# Altium PCB PCB1.PcbDocEVAL2.PcbDoc
Units mm, origin at the board's own origin, x right, y up, seen from the top; angles counter-clockwise.
Board outline 152.4 x 101.6 mm, 2 copper layers (Top Layer, Bottom Layer); 9 components, 5 nets, 39 pads, 0 vias.
Unrouted connection lines stored in the file: 13.
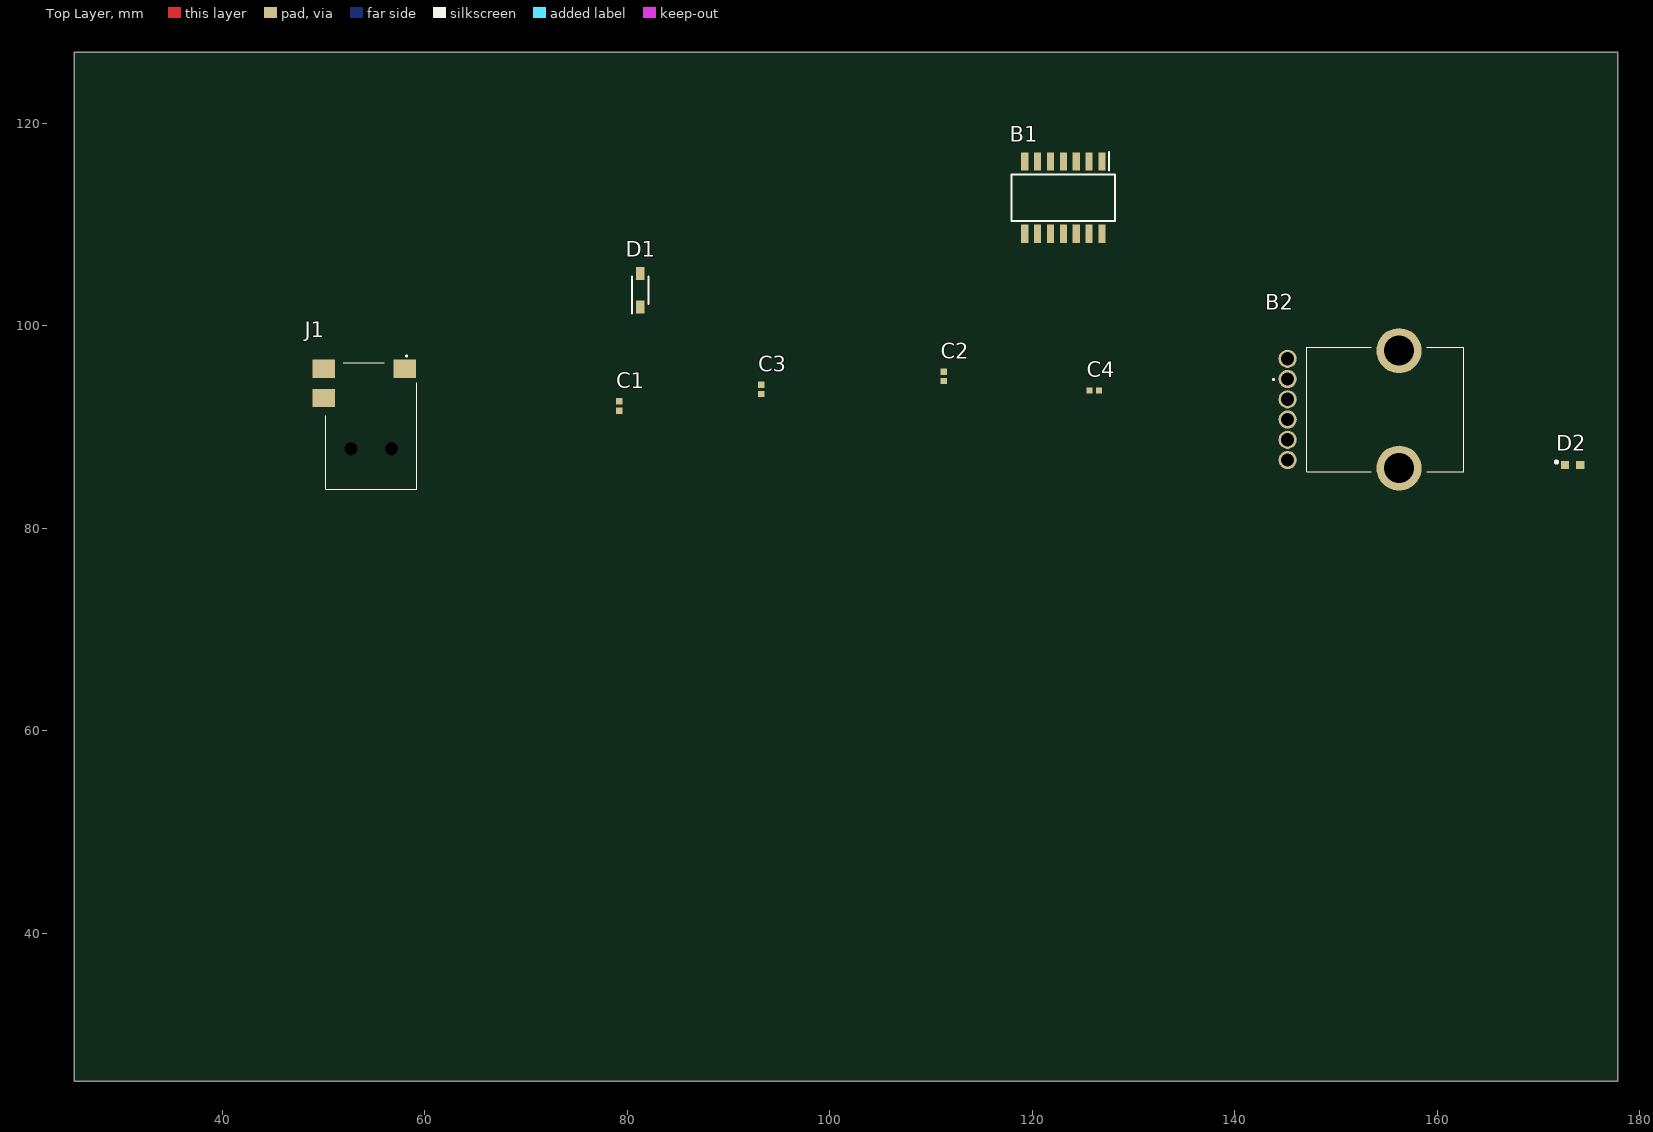
[diagram p0: Top Layer view]
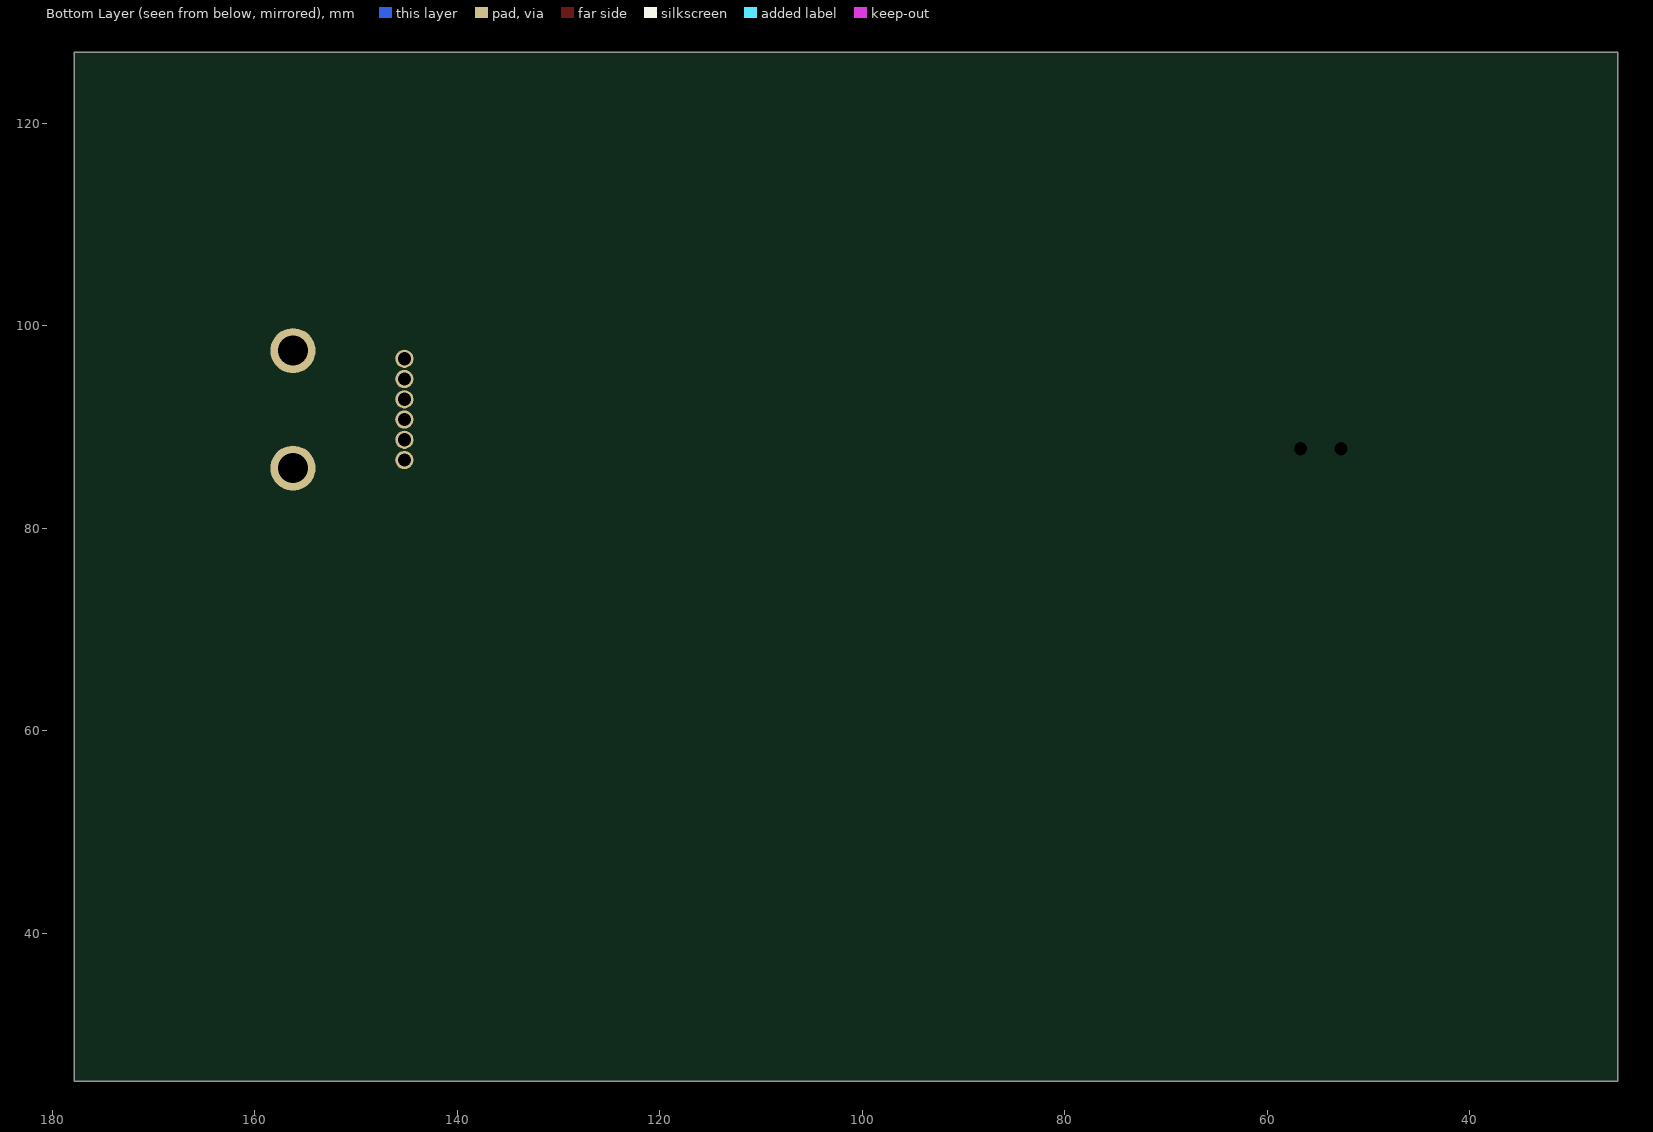
[diagram p1: Bottom Layer view, seen from below]

## Layer stack, top to bottom
Top Solder: solder mask 0.0102, Solder Resist, Dk 3.5
Top Layer: signal copper 0.0356
Dielectric 1: dielectric 0.32, FR-4, Dk 4.8
Bottom Layer: signal copper 0.0356
Bottom Solder: solder mask 0.0102, Solder Resist, Dk 3.5

## Board outline
25.4,25.4 177.8,25.4 177.8,127 25.4,127

## Design rules (kind name [scope] priority, off if disabled: settings)
Clearance [All] p1: gap=0.254 ignorepadtopadclearanceinfootprint=FALSE except(0: Arc-Hole Track-Hole SMDPad-Hole THPad-Hole Via-Hole Fill-Hole Poly-Hole Region-Hole Text-Hole)
PolygonConnect [All] p1: connectstyle=Relief reliefconductorwidth=0.254 reliefentries=4 polygonreliefangle="90 Angle" airgapwidth=0.254
RoutingVias [All] p1: holewidth=0.711 width=1.27 viastyle="Through Hole" minholewidth=0.711 minwidth=1.27 maxholewidth=0.711 maxwidth=1.27
SolderMaskExpansion [All] p1: expansion=0.102 istentingtop=FALSE
SupplyNets "Schematic Supply Nets" [InNet('GND')] p1: voltage=0.000
Width [All] p1: maxlimit=0.254 minlimit=0.254 preferedwidth=0.254
30 further rules are at their usual default settings.

## Components (designator, comment, footprint, x,y, rotation, side; value= is the part's Value field where it differs from the comment)
B1 "LM324NSR" SOIC127P780X200-14N 123.063,112.655 r270 top
B2 "PTV112-4420A-B104" PTV1124420AB104 145.21,94.736 r270 top
C1 "22uF" CAPC1005X06N 79.2,92.075 r90 top
C2 "22uF" CAPC1005X06N 111.252,94.996 r270 top
C3 "1uF" CAPC1005X06N 93.218,93.726 r270 top
C4 "1uF" CAPC1005X06N 126.111,93.599 r0 top
D1 "BZT52-C5V1-QX" SOD3616X130N 81.28,103.505 r90 top
D2 "LED-GREEN" SMD-1608-LED 173.355,86.233 r0 top
J1 "ADC-028-1-T/R" PJ1021SMTTR 54.738,90.108 r90 top

## Footprints (in the part's own frame and the unit in brackets; to place one, negate y for a bottom-side part, rotate by r counter-clockwise, add the part's x,y. Pads: shape width x height; smd on the part's side, far side on the other; paste and mask are expansions set on the pad)
CAPC1005X06N [mm] "Chip Capacitor, 2-Leads, Body 1,00x0,50mm, IPC Medium Density"
  rect 0.62x0.62 smd: 1(-0.46,0) 2(0.46,0)
  body extent -0.53,-0.28 0.53,0.28, height 0.55
PJ1021SMTTR [mm]
  rect 1.8x2.2 smd: 1(5.65,-3.3) 2(2.75,4.7) 3(5.65,4.7)
  round 0.65 hole 1.3 unplated: MH1(-2.25,-2) MH2(-2.25,2)
  silkscreen extent -6.25,-4.5 6.95,4.5, body extent -6.12,-3.94 6.38,5.46, height 6.01
PTV1124420AB104 [mm]
  round 1.8 hole 1.3: A1(0,0) A2(-2,0) A3(8,0) B1(2,0) B2(4,0) B3(6,0)
  round 4.455 hole 2.97: MH1(-2.8,11) MH2(8.8,11)
  silkscreen extent -3.15,-1.45 9.15,17.4, body extent -4.17,-0.55 10.19,17.4, height 20.6
SMD-1608-LED [mm]
  rect 0.8x0.8 smd paste+0 mask+0: 1(-0.75,0) 2(0.75,0)
  silkscreen extent -1.72,0.18 -1.47,0.42, body extent -1.25,-0.55 1.25,0.55, height 0.25
SOD3616X130N [mm]
  rect 1.25x0.8 smd: 1(-1.65,0) 2(1.65,0)
  silkscreen extent -2.27,-0.8 1.34,0.8, body extent -1.67,-0.84 1.93,0.76, height 1.19
SOIC127P780X200-14N [mm]
  rect 1.825x0.7 smd: 1(-3.562,3.81) 2(-3.562,2.54) 3(-3.562,1.27) 4(-3.562,0) 5(-3.562,-1.27) 6(-3.562,-2.54) 7(-3.562,-3.81) 8(3.562,-3.81) 9(3.562,-2.54) 10(3.562,-1.27) 11(3.562,0) 12(3.562,1.27) 13(3.562,2.54) 14(3.562,3.81)
  silkscreen extent -4.47,-5.1 2.3,5.1, body extent -3.9,-5.1 3.9,5.1, height 2

## Part data
B1: "Quadruple Operational Amplifier", Manufacturer_Name="Texas Instruments", Mouser Part Number=595-LM324NSR, Arrow Part Number=LM324NSR, Arrow Price/Stock=https://www.arrow.com/en/products/lm324nsr/texas-instruments?utm_currency=USD&region=nac, Datasheet Link=http://www.ti.com/lit/gpn/LM324, Geometry.Height=2mm, Manufacturer_Part_Number=LM324NSR, Mouser Price/Stock=https://www.mouser.co.uk/ProductDetail/Texas-Instruments/LM324NSR?qs=VBduBm9rCJQcjq4eh95DkA%3D%3D
B2: "Potentiometers PANEL CONTROL 100kOhm", Manufacturer_Name=Bourns, Mouser Part Number=652-PTV1124420AB104, Datasheet Link=https://www.bourns.com/docs/Product-Datasheets/PTVPTT.pdf, Geometry.Height=20.5mm, Manufacturer_Part_Number=PTV112-4420A-B104, Mouser Price/Stock=https://www.mouser.co.uk/ProductDetail/Bourns/PTV112-4420A-B104?qs=nqw9FAyaR8PT4wHHFlLdhA%3D%3D
C1 C2: library part Capacitor_pol
C3 C4: library part Capacitor
D1: "BZT52-Q series - Voltage regulator diodes@en-us", Manufacturer_Name=Nexperia, Mouser Part Number=771-BZT52-C5V1-QX, Datasheet Link=https://assets.nexperia.com/documents/data-sheet/BZT52-Q_SER.pdf, Geometry.Height=1.3mm, Manufacturer_Part_Number=BZT52-C5V1-QX, Mouser Price/Stock=https://www.mouser.co.uk/ProductDetail/Nexperia/BZT52-C5V1-QX?qs=rQFj71Wb1eWpKfJh0U4RGA%3D%3D
D2: "LED GREEN CLEAR CHIP SMD LTST-C190GKT", Case Code (Imperial)=0603, Case Code (Metric)=1608, Color=Green, Forward Current=30mA, Forward Voltage=2.1V, Lens Color=Colorless, Max Operating Temperature=85°C, Min Operating Temperature=-55°C, Package Quantity=1, Power Dissipation=100mW, Reverse Voltage=5V, Test Current=10mA, Voltage=2V, Case/Package=0603, Depth=0.8mm, Dominant Wavelength=569nm, Height=0.8mm, Illumination Color=Green, Lead Free="Lead Free", Length=1.6mm, Lens Style=Clear, Lens Transparency=Clear, Luminous Intensity=6mcd, Mount="Surface Mount", Number of Elements=1, Number of LEDs=1, Number of Pins=2, Packaging="Tape and Reel", Power Rating=100mW, Radiation Hardening=No, Viewing Angle=130°, Wavelength=565nm, Width=0.8mm
J1: "Connecteurs d'alimentation continue DC POWER JACK 2MM PIN TYPE 028", Manufacturer_Name="Same Sky", Mouser Part Number=737-ADC-028-1-T/R, Geometry.Height=6mm, Manufacturer_Part_Number=ADC-028-1-T/R, Mouser Price/Stock=https://www.mouser.fr/ProductDetail/Adam-Tech/ADC-028-1-T-R?qs=TTVbHWoAP%2FSiqsZeR9Co0Q%3D%3D

## Nets (pads, with @x,y where several pads share a name; then routed paths per layer and width w, separated by ;. In a path a pad name is that pad's centre, name@x,y a point inside that pad or via, vN(x,y) a via of type N, cw(c..) or ccw(c..) an arc to the next point about the centre after c; other vN are vias at no path point)
GND: B2.B3 C1.2 C2.2 C3.1 C4.1 D2.1
NetB1_10: B1.10 C1.1 C3.2 D1.1
NetB1_14: B1.14 B2.A2 C2.1 C4.2
NetB2_MH2: B2.MH2 D2.2
NetD1_2: D1.2 J1.3
pads on no net: B1.1 B1.2 B1.3 B1.4 B1.5 B1.6 B1.7 B1.8 B1.9 B1.11 B1.12 B1.13 B2.A1 B2.A3 B2.B1 B2.B2 B2.MH1 J1.1 J1.2 J1.MH1 J1.MH2

## Silkscreen, mask and mechanical layers (free items; w line width, h text height)
Mechanical 1:
  lines w1: 40.64,82.677 ccw(c43.706,82.677) 41.538,80.509 42.79,79.257 ccw(c44.958,81.425) 44.958,78.359 87.039,78.359 cw(c87.039,76.625) 88.265,77.851 170.307,77.851 ccw(c170.307,80.917) 172.475,78.749 174.87,81.144 ccw(c172.702,83.312) 175.768,83.312 175.768,119.38 ccw(c172.702,119.38) 174.87,121.548 173.491,122.927 ccw(c171.323,120.759) 171.323,123.825 44.196,123.825 ccw(c44.196,120.759) 42.028,122.927 41.538,122.437 ccw(c43.706,120.269) 40.64,120.269 40.64,82.677